# Altium PCB ESC.PcbDoc
Units mil, origin at the board's own origin, x right, y up, seen from the top; angles counter-clockwise.
Board outline 1970 x 910 mil, 4 copper layers (Top Layer, Layer 1, Layer 2, Bottom Layer), stack 23.756 mil thick; 44 components, 33 nets, 150 pads, 30 vias.
Unrouted connection lines stored in the file: 7.
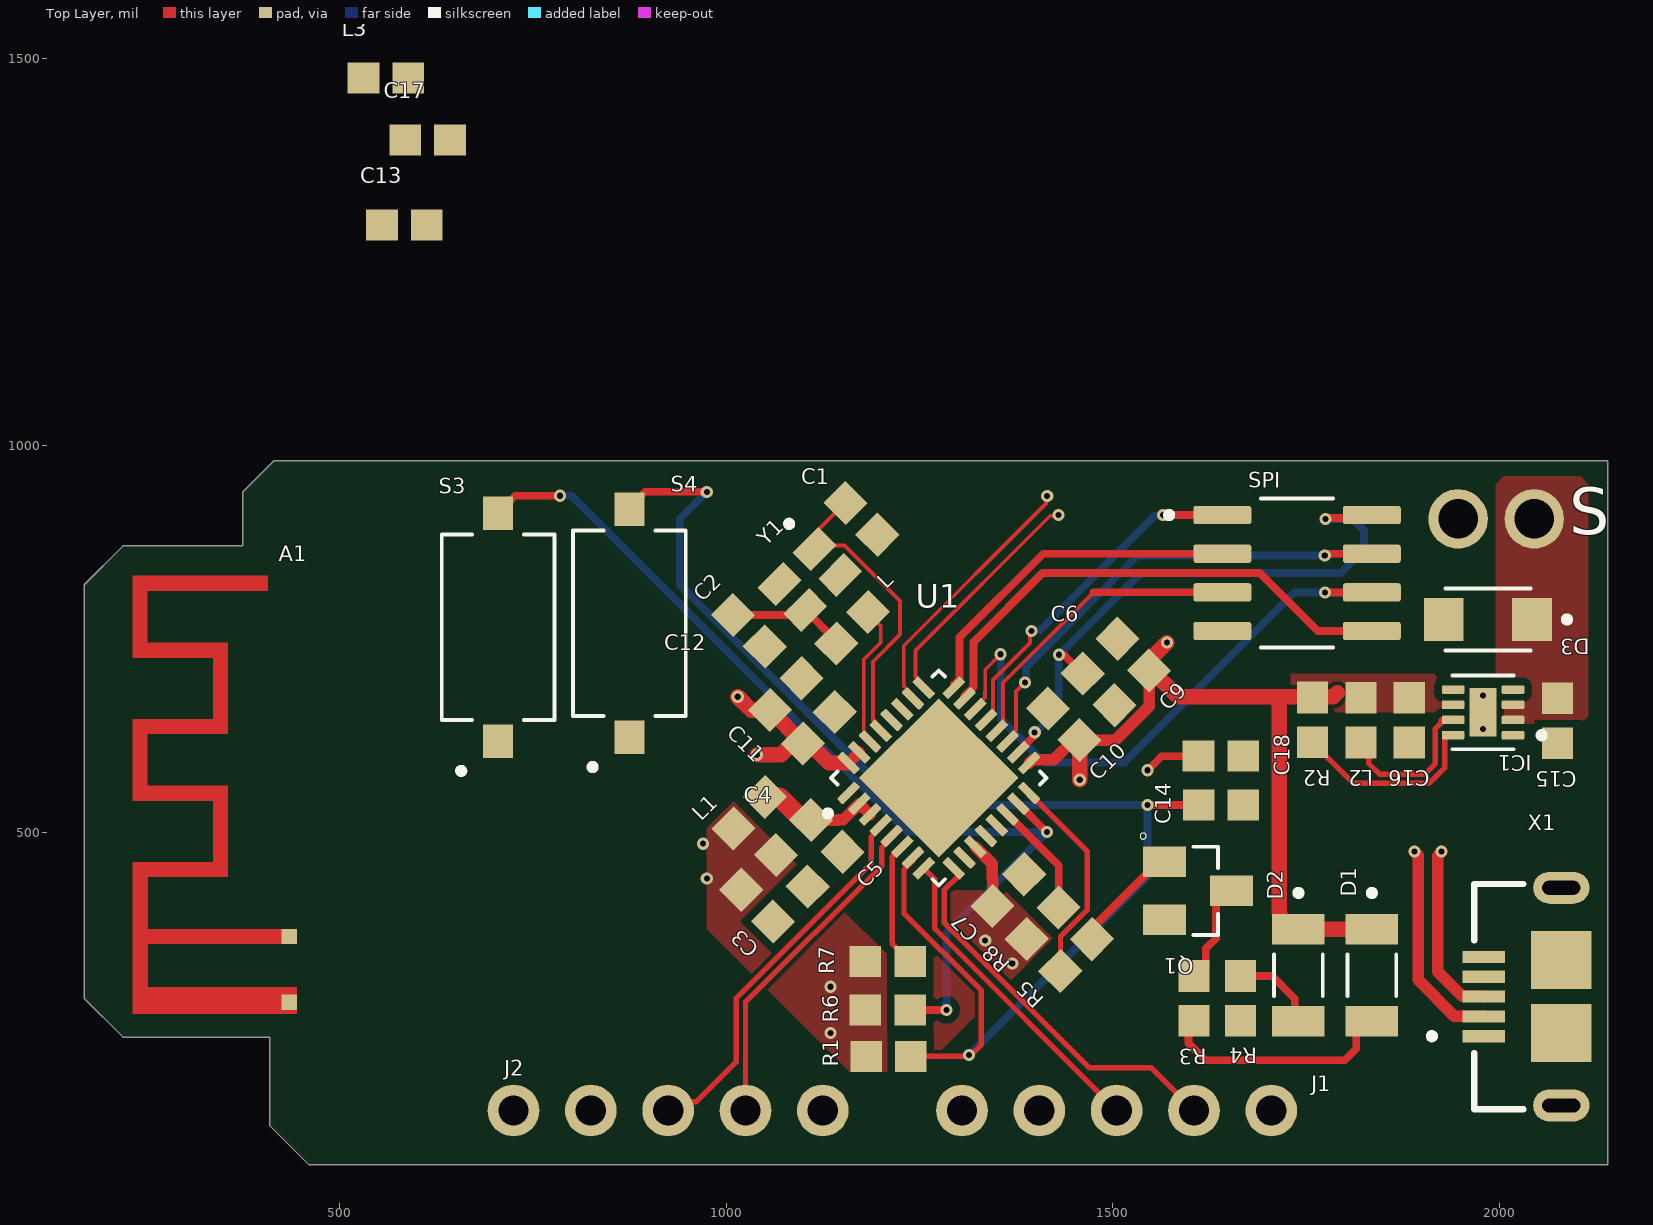
[diagram p0: Top Layer view]
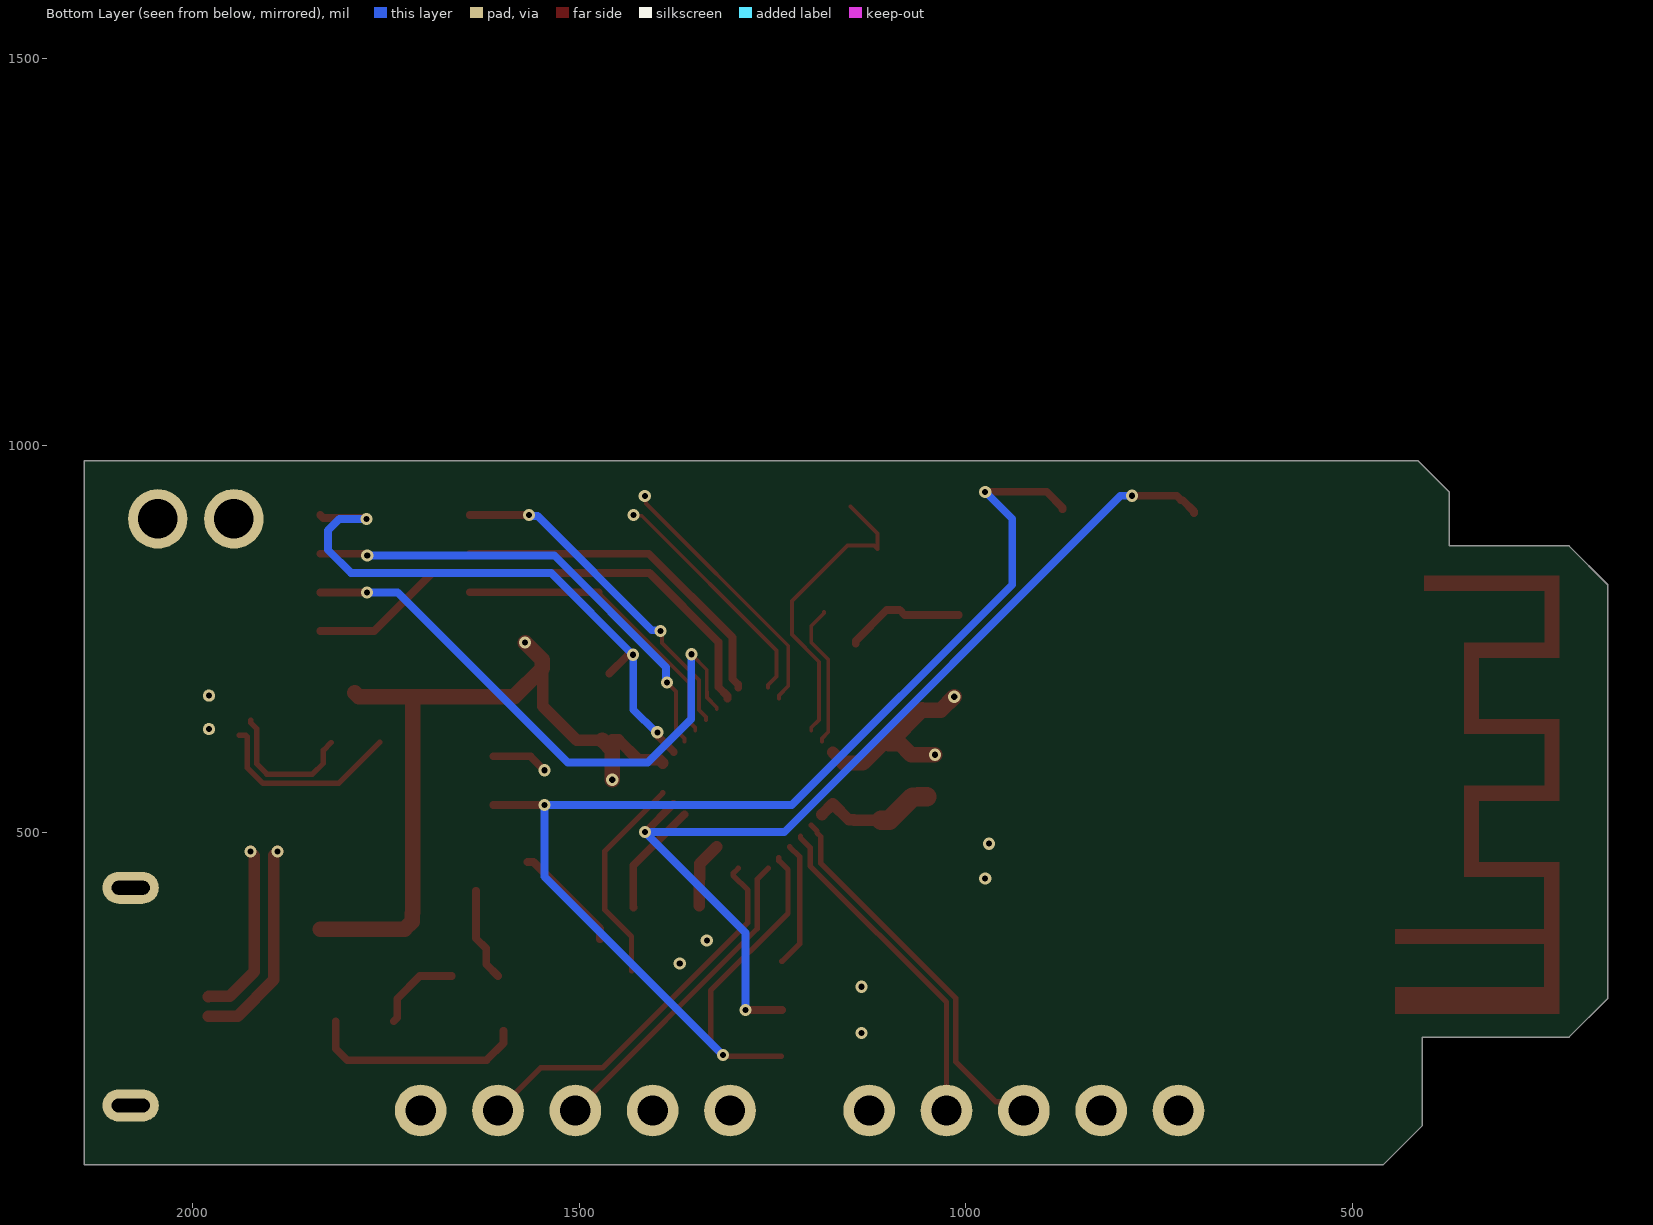
[diagram p1: Bottom Layer view, seen from below]
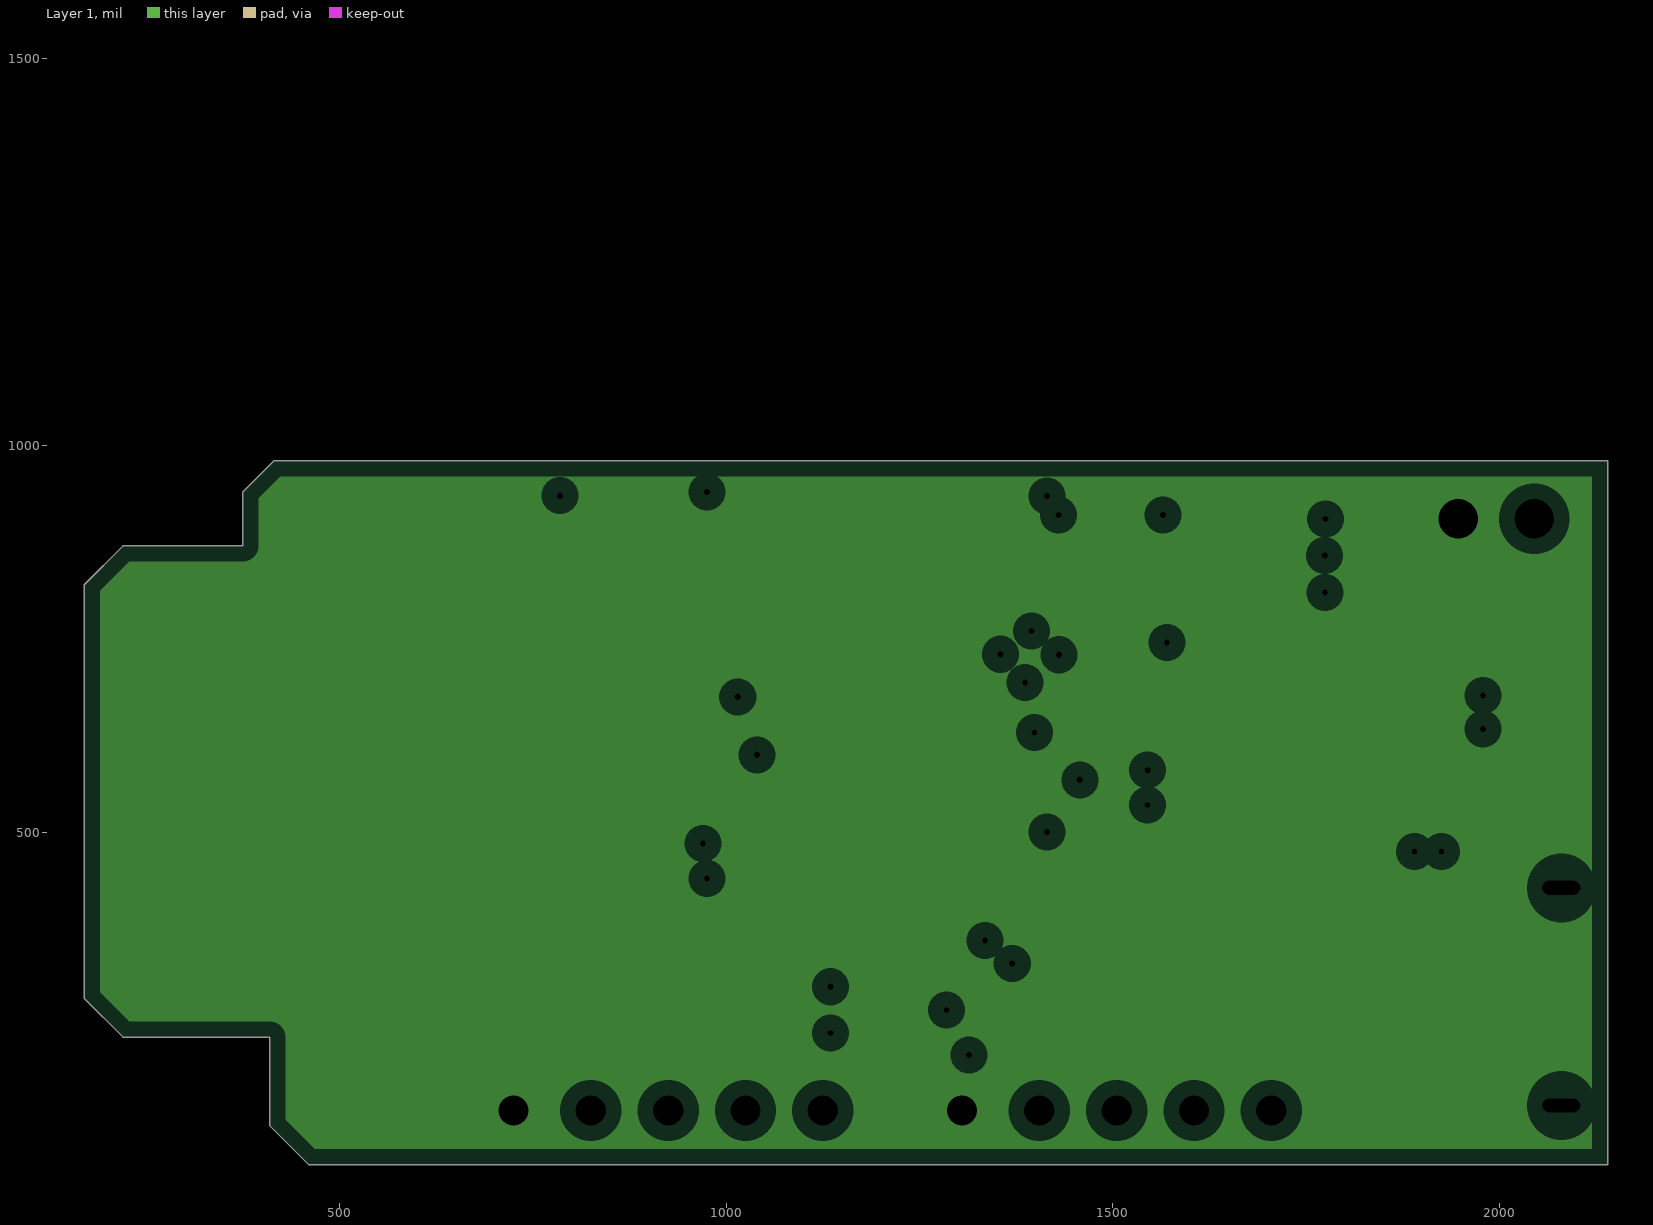
[diagram p2: Layer 1, clearances drawn from the general rule]
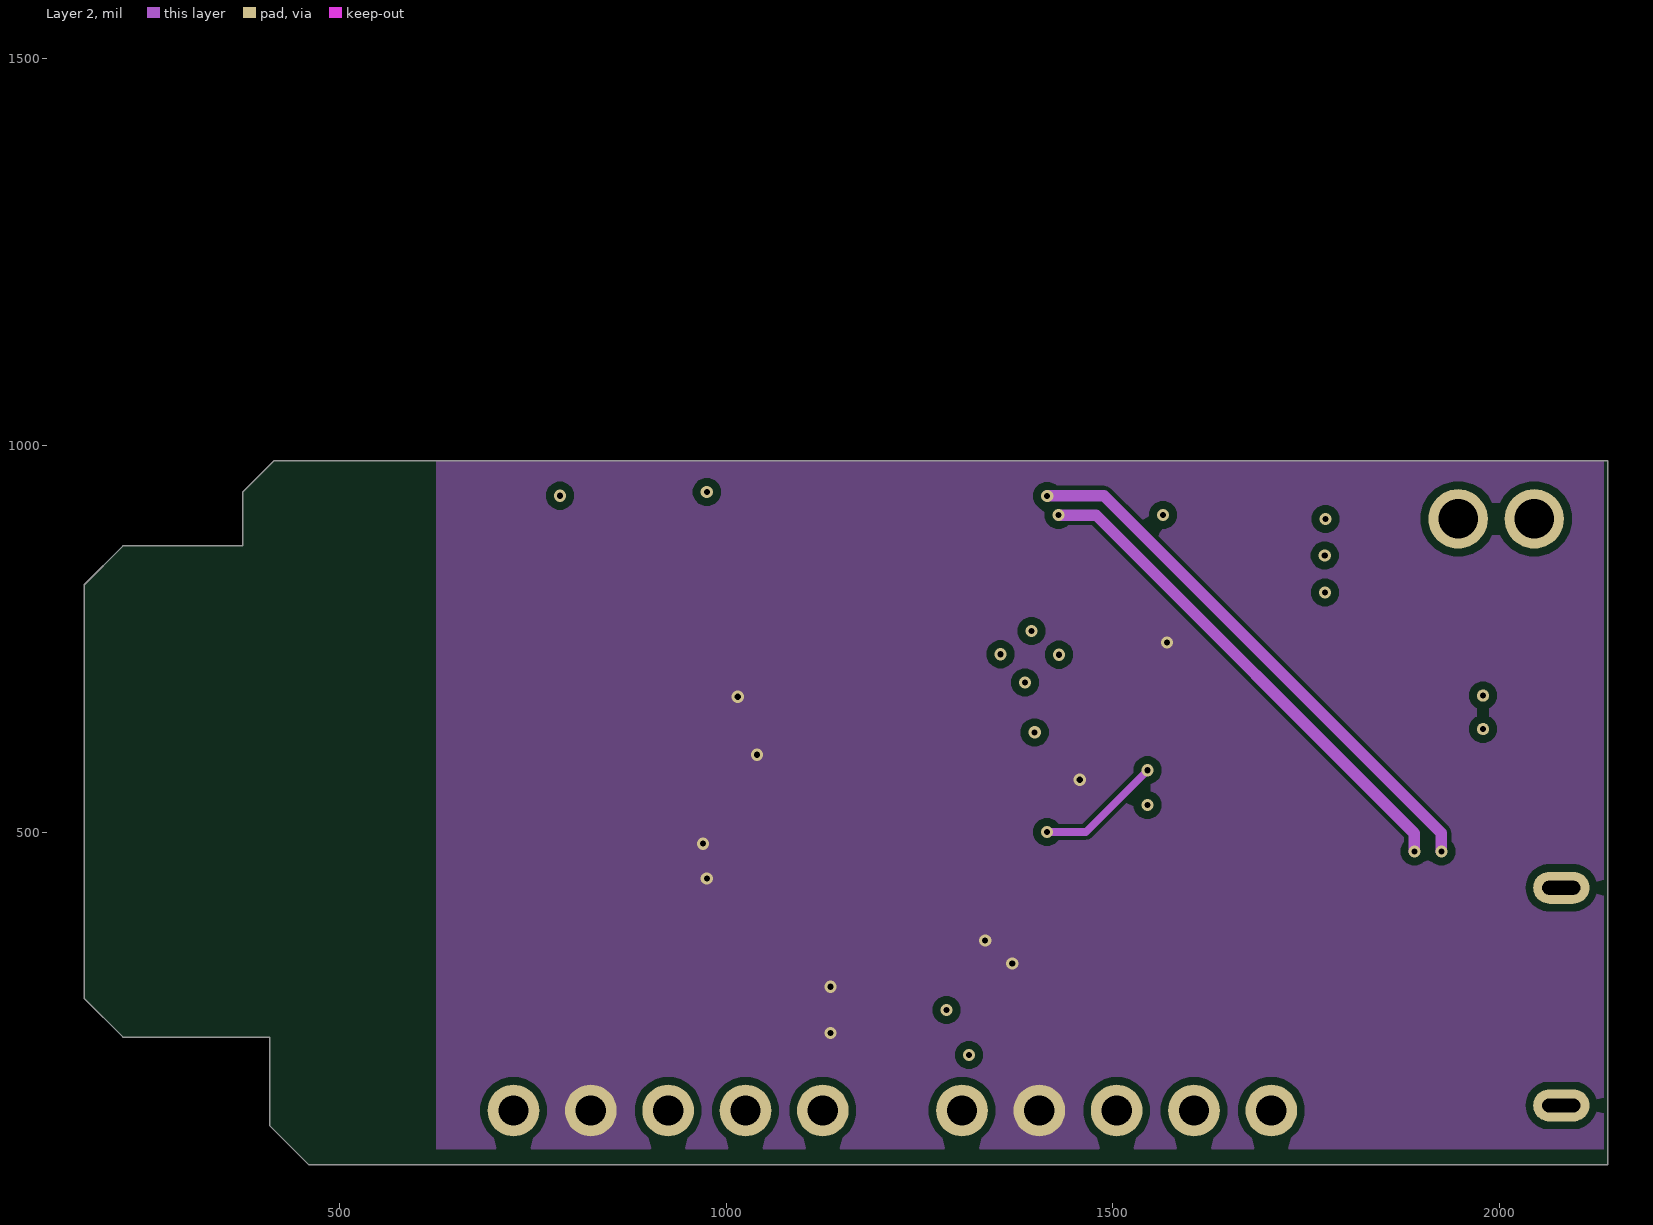
[diagram p3: Layer 2]
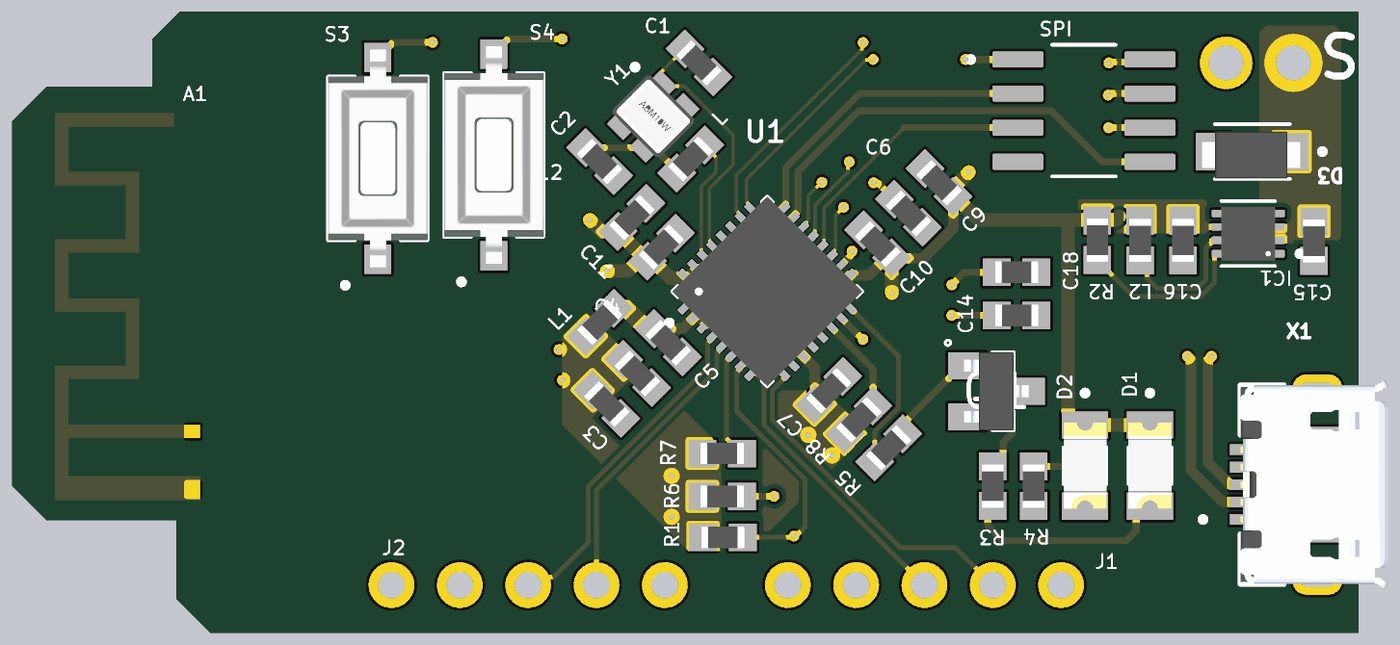
[diagram p4: 3D render of the assembled board from above, using the file's embedded part models]

## Layer stack, top to bottom
Top Solder: solder mask 0.4, Solder Resist, Dk 3.5
Top Layer: signal copper 1.4
Dielectric 2: prepreg 2.8, PP-006, Dk 4.1
Layer 1: plane copper 1.378, net GND
Dielectric 1: dielectric 12.6, FR-4, Dk 4.8
Layer 2: signal copper 1.378
Dielectric 3: prepreg 2.8, PP-006, Dk 4.1
Bottom Layer: signal copper 1.4
Bottom Solder: solder mask 0.4, Solder Resist, Dk 3.5

## Board outline
410,120 460,70 2140,70 2140,980 415,980 375,940 375,870 220,870 170,820 170,285 220,235 410,235

## Design rules (kind name [scope] priority, off if disabled: settings)
Clearance [All] p1: gap=10 ignorepadtopadclearanceinfootprint=TRUE except(0: Arc-Via Track-Via SMDPad-Via; 2: SMDPad-SMDPad; 5: Arc-Arc Arc-Track Arc-SMDPad Arc-Fill Arc-Poly Arc-Region Track-Track Track-SMDPad Track-Fill Track-Poly Track-Region)
DiffPairsRouting [All] p1: maxlimit=10 minlimit=10 mostfreqgap=10 toplayer_minwidth=5 toplayer_maxwidth=15 toplayer_prefwidth=15 midlayer1_minwidth=15 midlayer1_maxwidth=15 midlayer1_prefwidth=15 bottomlayer_minwidth=15 bottomlayer_maxwidth=15 bottomlayer_prefwidth=15 maxuncoupledlength=500
PlaneClearance [All] p1: clearance=20
PlaneConnect [All] p1: planeconnectstyle=Direct reliefexpansion=20 reliefentries=4 reliefconductorwidth=10 reliefairgap=10
PolygonConnect [All] p1: connectstyle=Direct reliefconductorwidth=10 reliefentries=4 polygonreliefangle="90 Angle" airgapwidth=10
RoutingVias [All] p1: holewidth=5.91 width=9.84 viastyle="Through Hole" minholewidth=5.91 minwidth=9.84 maxholewidth=28 maxwidth=50
SolderMaskExpansion [All] p1: expansion=4 istentingtop=FALSE
SupplyNets "Schematic Supply Nets_2" [InNet('VIN')] p1: voltage=0.000
SupplyNets "Schematic Supply Nets_1" [InNet('+3.3V')] p2: voltage=0.000
SupplyNets "Schematic Supply Nets" [InNet('GND')] p3: voltage=0.000
ViasUnderSMD [All] p1: allowed=TRUE
Width [All] p1: maxlimit=50 minlimit=5 preferedwidth=10 midlayer1_minwidth=10 bottomlayer_minwidth=10 minimp=50.000000 maximp=50.000000 favimp=50.000000
27 further rules are at their usual default settings.

## Classes and differential pairs
differential pair USB_D: +USB_D_P -USB_D_N

## Components (designator, comment, footprint, x,y, rotation, side; value= is the part's Value field where it differs from the comment)
A1 "Antenna" Antenna 445,245 r90 top
C1 "C_8pF" 0603 1175,905 r135 top
C2 "C_8pF" 0603 1029.54,760.46 r135 top
C3 "C_10uF" 0603 1040,405 r135 top
C4 "C_0.1uF" 0603 1085,450 r135 top
C5 "C_1uF" 0603 1130,495 r135 top
C6 "C_1uF" 0603 1481.58,684.58 r135 top
C7 "C_0.1uF" 0603 1365,425 r225 top
C9 "C_10uF" 0603 1526.58,729.58 r315 top
C10 "C_0.1uF" 0603 1436.58,639.58 r315 top
C11 "C_1uF" 0603 1076.99,678.45 r225 top
C12 "C_10nF" 0603 1120,635 r225 top
C13 "C_3p3F" 0603 583.94,1285 r0 top
C14 "C_1uF" 0603 1640,535 r180 top
C15 "C_10uF" 0603 2075,643.94 r90 top
C16 "C_22uF" 0603 1883.36,644.83 r90 top
C17 "C_3p3F" 0603 613.94,1395 r0 top
C18 "C_0.1uF" 0603 1639.88,598.15 r180 top
D1 "LED" LEDC3216X120N 1835,315 r270 top
D2 "LED" LEDC3216X120N 1740,315 r270 top
D3 "TVS_7V" TVS_6V 1985,775 r180 top
IC1 "TPS62172DSGT" TPS62172 1978.78,654.84 r180 top
J1 "Joystick" joystick 1305,140 r0 top
J2 "Joystick" joystick 725,140 r0 top
L "L_24nH" 0603 1162.92,764.14 r45 top
L1 "L_2nH" 0603 1030,525 r45 top
L2 "L_2.2uH" 0603 1820.71,644.83 r270 top
L3 "L_2n2H" 0603 560,1475 r0 top
Q1 "BJT" SOT95P240X111-3N 1610.25,423.98 r0 top
R1 "R_100k" 0603 1210,210 r180 top
R2 "R_10k" 0603 1758.15,645.18 r270 top
R3 "R_220" 0603 1605,285 r270 top
R4 "R_220" 0603 1665,285 r90 top
R5 "R_1k" 0603 1452.61,341.05 r45 top
R6 "R_10k" 0603 1208.94,270 r180 top
R7 "R_10k" 0603 1208.94,332.79 r180 top
R8 "R_10k" 0603 1409.24,382.05 r225 top
S "screwconnect" supply 1946.57,905 r180 top
S3 "switch" switch 705,765 r90 top
S4 "switch" switch 875,770 r90 top
SPI "SST26VF016B" SOIC127P600X175-8N 1738.35,835 r0 top
U1 "ESP32-C3" QFN50P500X500X90-33N 1275,570 r45 top
X1 "USB3090-XX-X_REVE2" GCT_USB3090-XX-X_REVE2 2080,287.24 r90 top
Y1 "ABM10W-40.0000MHZ-8-D1X-T3" XTAL_ABM10W-40.0000MHZ-8-D1X-T3 1108.22,826.64 r315 top

## Footprints (in the part's own frame and the unit in brackets; to place one, negate y for a bottom-side part, rotate by r counter-clockwise, add the part's x,y. Pads: shape width x height; smd on the part's side, far side on the other; paste and mask are expansions set on the pad)
0603 [mm]
  rect 1.04x1.02 smd: 1(-0.735,0) 2(0.735,0)
  body extent -0.8,-0.4 0.8,0.4, height 0.55
Antenna [mil]
  rect 19.68x19.68 smd paste-99999 mask+4: 1(120,10) 2(35,10)
  Top Layer region: 215,89.04 300,89.04 300,108.73 215,108.73
  Top Layer region: 19.56,0 54.99,0 54.99,200 19.56,200
  Top Layer region: 110.24,0.07 129.92,0.07 129.92,195.07 110.24,195.07
  Top Layer region: 196.85,89.04 216.54,89.04 216.54,200.07 196.85,200.07
  Top Layer region: 295.28,89.04 314.96,89.04 314.96,195.07 295.28,195.07
  Top Layer region: 381.89,89.04 401.57,89.04 401.57,200.07 381.89,200.07
  Top Layer region: 400,89.04 490,89.04 490,108.73 400,108.73
  Top Layer region: 480.31,89.04 500,89.04 500,200.07 480.31,200.07
  Top Layer region: 480.31,192.98 586.61,192.98 586.61,212.66 480.31,212.66
  Top Layer region: 566.92,37.78 586.6,37.78 586.6,199.99 566.92,199.99
  Top Layer region: 19.56,192.91 216.41,192.91 216.41,212.6 19.56,212.6
  Top Layer region: 295.28,192.98 401.57,192.98 401.57,212.66 295.28,212.66
GCT_USB3090-XX-X_REVE2 [mm]
  rect 0.4x1.4 smd: 1(-1.3,2.55) 2(-0.65,2.55) 3(0,2.55) 4(0.65,2.55) 5(1.3,2.55)
  oval 1.05x1.85 hole 0.45 slot 1.25 at 90 deg: SH1(-3.575,0) SH4(3.575,0)
  rect 1.9x2 smd: SH2(-1.2,0) SH3(1.2,0)
  silkscreen extent -3.7,1.24 3.7,4.35, body extent -3.9,-2.64 3.9,2.86, height 2.71
joystick [mm]
  round 1.7 hole 1: 1(0,0) 2(2.54,0) 3(5.08,0) 4(7.62,0) 5(10.16,0)
LEDC3216X120N [mm]
  rect 1.01x1.73 smd: NEG(1.51,0) POS(-1.51,0)
  silkscreen extent -2.8,-0.8 0.68,0.8, body extent -1.6,-0.8 1.6,0.8, height 1.2
QFN50P500X500X90-33N [mm]
  rrect25% 0.81x0.27 smd mask+0: 1(-2.445,1.75) 2(-2.445,1.25) 3(-2.445,0.75) 4(-2.445,0.25) 5(-2.445,-0.25) 6(-2.445,-0.75) 7(-2.445,-1.25) 8(-2.445,-1.75) 17(2.445,-1.75) 18(2.445,-1.25) 19(2.445,-0.75) 20(2.445,-0.25) 21(2.445,0.25) 22(2.445,0.75) 23(2.445,1.25) 24(2.445,1.75)
  rrect25% 0.27x0.81 smd mask+0: 9(-1.75,-2.445) 10(-1.25,-2.445) 11(-0.75,-2.445) 12(-0.25,-2.445) 13(0.25,-2.445) 14(0.75,-2.445) 15(1.25,-2.445) 16(1.75,-2.445) 25(1.75,2.445) 26(1.25,2.445) 27(0.75,2.445) 28(0.25,2.445) 29(-0.25,2.445) 30(-0.75,2.445) 31(-1.25,2.445) 32(-1.75,2.445)
  rect 3.7x3.7 smd paste-0.68 mask+0.05: 33(0,0)
  silkscreen extent -3.5,-2.5 2.5,2.5, body extent -2.5,-2.5 2.5,2.5, height 0.9
SOIC127P600X175-8N [mm]
  rrect25% 1.9x0.6 smd: 1(-2.455,1.905) 2(-2.455,0.635) 3(-2.455,-0.635) 4(-2.455,-1.905) 5(2.455,-1.905) 6(2.455,-0.635) 7(2.455,0.635) 8(2.455,1.905)
  silkscreen extent -4.3,-2.45 1.18,2.45
SOT95P240X111-3N [mm]
  rect 1.4x1 smd: 1(-1.1,0.95) 2(-1.1,-0.95) 3(1.1,0)
  silkscreen extent -1.9,-1.45 0.65,1.9, body extent -1.2,-1.45 1.2,1.45, height 1.11
supply [mm]
  round 1.95 hole 1.3: 1(-2.5,0) 2(0,0)
switch [mm]
  rect 1.1x1 smd: 1(-3.75,0) 2(3.75,0)
  silkscreen extent -4.82,-1.85 3.05,1.85, body extent -4.05,-1.85 4.05,1.85, height 2.5
TPS62172 [mm]
  rrect25% 0.74x0.28 smd paste+0 mask+0.102: 1(-0.985,0.75) 2(-0.985,0.25) 3(-0.985,-0.25) 4(-0.985,-0.75) 5(0.985,-0.75) 6(0.985,-0.25) 7(0.985,0.25) 8(0.985,0.75)
  rect 0.9x1.6 smd paste-2 mask+0.102: 9(0,0)
  round 0.4 hole 0.2 mask+0: 9_1(0,0.55) 9_2(0,-0.55)
  silkscreen extent -2.02,-1.21 1,1.21, body extent -1,-1 1,1, height 0.8
TVS_6V [mm]
  rect 1.3x1.4 smd paste+0 mask+0.102: 1(-1.45,0) 2(1.45,0)
  silkscreen extent -2.7,-1.02 1.4,1.02, body extent -1.78,-0.75 1.87,1, height 1
XTAL_ABM10W-40.0000MHZ-8-D1X-T3 [mm]
  rect 0.85x1.2 smd: 1(-0.6,0.812) 2(-0.6,-0.812) 3(0.6,-0.812) 4(0.6,0.812)
  silkscreen extent -1.87,0.71 -1.68,0.91, body extent -1.25,-1 1.25,1, height 0.6

## Part data
D1 D2: "2.6 V Red LED SMD", Package=None, Check_prices=https://www.snapeda.com/parts/LHN974%20RED%20LED%201206/Osram/view-part/?ref=eda, MF=Osram, MP="LHN974 RED LED 1206", SnapEDA_Link=https://www.snapeda.com/parts/LHN974%20RED%20LED%201206/Osram/view-part/?ref=snap
D3: "600W Surface Mount TVS Diode", Package=None, Availability=Unavailable, Check_prices=https://www.snapeda.com/parts/SMBJ7.5A/Littelfuse/view-part/?ref=eda, MF="Littelfuse Inc.", MP=SMBJ7.5A, Price=None, SnapEDA_Link=https://www.snapeda.com/parts/SMBJ7.5A/Littelfuse/view-part/?ref=snap
IC1: "Buck Switching Regulator IC Positive Fixed 3.3V 1 Output 500mA 8-WFDFN Exposed Pad", Package="WSON-8 Texas Instruments", Check_prices=https://www.snapeda.com/parts/TPS62172DSG/Texas+Instruments/view-part/?ref=eda, MF="Texas Instruments", MP=TPS62172DSG, SnapEDA_Link=https://www.snapeda.com/parts/TPS62172DSG/Texas+Instruments/view-part/?ref=snap
L L1 L2 L3: Package="2016 Murata", Availability=Unavailable, MF="Murata Electronics", MP=DFE201612E-2R2M=P2, Price=None, SnapEDA_Link=https://www.snapeda.com/parts/DFE201612E-2R2M%3DP2/Murata%20Electronics%20North%20America/view-part/703024/?ref=snap
Q1: "Transistor, Bipolar,Si,NPN,General Purpose,VCEO 40VDC,IC 200mA,PD 225mW,SOT-23", Package="SOT-23-3 ON Semiconductor", Check_prices=https://www.snapeda.com/parts/MMBT3904LT1G/Onsemi/view-part/?ref=eda, MF="ON Semiconductor", MP=MMBT3904LT1G, SnapEDA_Link=https://www.snapeda.com/parts/MMBT3904LT1G/Onsemi/view-part/?ref=snap
R1 R2 R3 R4 R5 R6 R7 R8: Package="RADIAL-2 YAGEO", Check_prices=https://www.snapeda.com/parts/MFR-25FBF52-10K/Yageo/view-part/?ref=eda, MF=Yageo, MP=MFR-25FBF52-10K, SnapEDA_Link=https://www.snapeda.com/parts/MFR-25FBF52-10K/Yageo/view-part/?ref=snap
S: "2 Position Wire to Board Terminal Block Horizontal with Board 0.197 (5.00mm) Through Hole", Package=None, Check_prices=https://www.snapeda.com/parts/691137710002/W%25C3%25BCrth+Elektronik+Midcom/view-part/?ref=eda, MF="WÃ¼rth Elektronik", MP=691137710002, SnapEDA_Link=https://www.snapeda.com/parts/691137710002/W%25C3%25BCrth+Elektronik+Midcom/view-part/?ref=snap
S3 S4: "6.1 x 3.7 mm, 2.5 mm Actuator Height, 160 gf, White, Surface Mount, SPST, Tactile Switch /  / TS09-63-25-WT-160-SMT-TR", Package=None, Check_prices=https://www.snapeda.com/parts/TS09-63-25-WT-160-SMT-TR/Same+Sky/view-part/?ref=eda, MF="Same Sky", MP=TS09-63-25-WT-160-SMT-TR, SnapEDA_Link=https://www.snapeda.com/parts/TS09-63-25-WT-160-SMT-TR/Same+Sky/view-part/?ref=snap
U1: "WiFi Modules (802.11) (Engineering Samples Only) SMD IC ESP32-C3, RISC-V single-core MCU, 2.4G Wi-Fi & BLE 5.0 combo, QFN 32-pin, 5*5 mm, 40 ~ 105C", Package="VFQFN-32 Espressif Systems", Check_prices=https://www.snapeda.com/parts/ESP32-C3/Espressif+Systems/view-part/?ref=eda, MF="Espressif Systems", MP=ESP32-C3, SnapEDA_Link=https://www.snapeda.com/parts/ESP32-C3/Espressif+Systems/view-part/?ref=snap
X1: "USB - micro AB USB 2.0 Receptacle Connector 5 Position Surface Mount, Right Angle; Through Hole, 2.35mm profile, 5 Pins, Horizontal, Bottom mount", Package=None, Check_prices=https://www.snapeda.com/parts/USB3090-30-A/Global+Connector+Technology/view-part/?ref=eda, MF="Global Connector Technology", MP=USB3090-30-A, SnapEDA_Link=https://www.snapeda.com/parts/USB3090-30-A/Global+Connector+Technology/view-part/?ref=snap
Y1: "IoT OPTIMIZED LOW PROFILE QUARTZ CRYSTAL", Package="SMD-4 Abracon", Check_prices=https://www.snapeda.com/parts/ABM10W-40.0000MHZ-8-D1X-T3/Abracon/view-part/?ref=eda, MF=Abracon, MP=ABM10W-40.0000MHZ-8-D1X-T3, SnapEDA_Link=https://www.snapeda.com/parts/ABM10W-40.0000MHZ-8-D1X-T3/Abracon/view-part/?ref=snap

## Via types
v1: diameter 15.75, hole 7.87, Top Layer to Bottom Layer, 30 vias

## Nets (pads, with @x,y where several pads share a name; then routed paths per layer and width w, separated by ;. In a path a pad name is that pad's centre, name@x,y a point inside that pad or via, vN(x,y) a via of type N, cw(c..) or ccw(c..) an arc to the next point about the centre after c; other vN are vias at no path point)
+3.3V: C3.2 C4.2 C7.2 C9.2 C10.2 C11.2 C12.2 C16.2 D1.POS D2.POS IC1.6 J1.2 J2.2 L1.1 L2.1 R1.2 R2.1 R6.2 R7.2 R8.2 U1.11 U1.17 U1.31 U1.32 | length 1342.2
  Top Layer w15: U1.32 U1.31 ; U1.11 1344.29,458.95 1344.29,440.01 1344.82,439.48 1344.82,404.82 C7.2 ; U1.17 1396.21,593.77 1423.77,593.77 1449.12,619.12 C10.2 ; C10.2@1470,618.84 1503.39,618.84 1547.32,662.77 C9.2@1547.32,708.84
  Top Layer w20: v1(1015,675) 1032.29,657.71 1056.25,657.71 C11.2 1056.53,657.77 1099.54,614.76 C12.2 1085.28,614.54 1070.75,600 v1(1040,600) ; C12.2@1099.82,614.82 1107.77,614.82 1133.24,589.35 U1.32 ; v1(1457.32,567.68) 1457.32,606.16 C10.2@1470,618.84 ; v1(1570,745) 1547.71,722.71 1547.71,711.59 1584.3,675 1715,675 ; 1790,680 1785,675 1715,675 ; D1.POS D2.POS 1725.83,374.45 1715.94,384.33 1715.94,395.1 1715,396.05 1715,675
  other v1: 1135,240 1135,300 1370,330 1335,360 975,440 970,485
GND: A1.2 C1.1 C2.1 C3.1 C4.1 C5.1 C6.1 C7.1 C9.1 C10.1 C11.1 C12.1 C13.1 C14.1 C15.1 C16.1 C17.1 C18.1 D3.2 IC1.1 IC1.4 IC1.5 J1.1 J2.1 Q1.2 R4.1 S3.1 S4.1 S.2 SPI.4 X1.5 Y1.2 Y1.4
NetA1_1: A1.1 C13.2 L3.1
NetC1_2: C1.2 U1.29 Y1.1 | length 398.7
  Top Layer w5: C1.2@1149.08,920.92 1114.12,885.97 Y1.1 1119,870.82 1153.27,870.82 1225,799.09 1225,755.36 1190,720.36 1190,645.06 1199.97,635.09 U1.29
NetC2_2: C2.2 L.1 Y1.3 | length 156.4
  Top Layer w10: C2.2 1009.36,780.64 1079.04,780.64 1085.73,787.34 Y1.3 1142.46,747.19 L.1
NetC5_2: C5.2 L1.2 U1.2 U1.3 | length 162.7
  Top Layer w15: C5.2@1109.82,515.18 1144.48,515.18 1145.01,515.71 1151.12,515.71 U1.2 U1.3
  Top Layer w25: L1.2 1050.74,545.74 1061.46,545.74 1061.74,545.46 1068.82,545.46 1098.82,515.46 C5.2
NetC6_2: C6.2 SPI.8 U1.18 | length 783.2
  Top Layer w10: U1.18 1377.86,603.71 1397.93,623.78 1397.93,627.93 v1(1399.03,629.03) ; v1(1430.65,729.35) 1431.75,728.25 1437.91,728.25 C6.2 ; v1(1775,905) 1776.1,906.1 1831.1,906.1 SPI.8
  Bottom Layer w10: v1(1399.03,629.03) 1400.58,629.03 1430,658.44 1430,728.7 v1(1430.65,729.35) 1536.3,835 1795,835 1825,865 1825,890 1810,905 v1(1775,905)
NetC14_2: C14.2 R1.1 S4.2 U1.7 | length 1838.6
  Top Layer w7: R1.1 1315,210 1330,225 1330,295 1230,395 1230,451.42 1241.73,463.15 U1.7
  Top Layer w10: S4.2 875,919.61 895.39,940 v1(975,940) ; v1(1545,535) C14.2
  Bottom Layer w10: v1(975,940) 940,905 940,820 1225,535 v1(1545,535) 1545,442.59 v1(1314.15,211.74)
NetC17_2: C17.2 L3.2 U1.1
NetC18_2: C18.2 R6.1 S3.2 U1.15 | length 1520.5
  Top Layer w10: S3.2 705,914.61 719.69,929.29 721.65,929.29 727.36,935 v1(785,935) ; R6.1 v1(1285,270) ; U1.15 1378.07,536.73 1414.8,500 v1(1415,500) ; v1(1545,580) 1563.15,598.15 C18.2
  Layer 2 w10: v1(1415,500) 1465,500 v1(1545,580)
  Bottom Layer w10: v1(785,935) 800,935 1235,500 v1(1415,500) 1285,370 v1(1285,270)
NetD1_NEG: D1.NEG R3.2 | length 284.2
  Top Layer w10: R3.2@1597.85,243.21 1597.85,227.15 1620,205 1800,205 1815,220 D1.NEG@1815,255.55
NetD2_NEG: D2.NEG R4.2 | length 113.5
  Top Layer w10: R4.2 1706.06,313.94 1735.42,284.58 1735.42,260.13 D2.NEG
NetIC1_7: IC1.7 L2.2 | length 188.6
  Top Layer w7: L2.2 1830.98,605.64 1830.98,589.02 1845,575 1903.92,575 1916.93,588.01 1916.93,633.54 1925,641.61 1925,645
NetIC1_8: IC1.8 R2.2 | length 253.3
  Top Layer w7: R2.2 1758.15,615.85 1811,563 1908.89,563 1929.34,583.45 1929.34,623.3 1931.35,625.31 IC1.8
NetJ1_3: J1.3 U1.8 | length 416.5
  Top Layer w7: U1.8 1270,438.87 1270,375 J1.3
NetJ1_4: J1.4 U1.9 | length 504.4
  Top Layer w7: U1.9 1300.92,446.64 1300.92,444.07 1282,425.15 1282,383 1470,195 1550,195 J1.4
NetJ2_3: J2.3 U1.4 | length 497.4
  Top Layer w7: J2.3 936.47,151.47 961.47,151.47 1013,203 1013,284.97 1187.64,459.61 1187.64,493.99 1192.46,498.81 1192.46,501.38 U1.4
NetJ2_4: J2.4 U1.5 | length 433.2
  Top Layer w7: J2.4 1025,280 1201.41,456.41 1201.41,479.92 1213.89,492.41 U1.5
NetL_2: L.2 U1.30 | length 186.8
  Top Layer w5: L.2 1183.39,782.97 1200,766.35 1200,745 1177.99,722.99 1177.99,629.23 1186.05,621.17 U1.30
NetQ1_1: Q1.1 R5.2 | length 143.4
  Top Layer w10: R5.2 1473.07,375.38 1559.07,461.38 Q1.1
NetQ1_3: Q1.3 R3.1 | length 121.9
  Top Layer w10: R3.1 1620.08,329.02 1620.08,349.41 1633.56,362.89 Q1.3@1633.56,423.98
NetR5_1: R5.1 U1.16 | length 275.6
  Top Layer w7: U1.16 1466.88,475.56 1466.88,399.27 1432.43,364.81 1432.43,320.86 R5.1
NetR7_1: R7.1 U1.6 | length 163.3
  Top Layer w7: U1.6 1227.81,480.95 1215,468.14 1215,355.27 1237.48,332.79 R7.1
NetR8_1: R8.1 U1.14 | length 147.8
  Top Layer w10: U1.14 1429.98,456.77 1429.98,402.79 R8.1
NetSPI_1: SPI.1 U1.21 | length 448.2
  Top Layer w5: U1.21 1336.11,649.01 1345,657.9 1345,696.75 1392.94,744.7 1392.94,757.94 v1(1395,760)
  Top Layer w10: v1(1565,910) SPI.1
  Bottom Layer w10: v1(1395,760) 1396.1,761.1 1406.1,761.1 1553.9,908.9 1563.9,908.9 v1(1565,910)
NetSPI_2: SPI.2 U1.24 | length 452.9
  Top Layer w10: U1.24 1294.35,690.76 1301.86,698.28 1301.74,698.4 1301.74,751.74 1410,860 SPI.2
NetSPI_3: SPI.3 U1.20 | length 397.4
  Top Layer w5: U1.20 1350.03,635.09 1358.09,643.15 1358.09,693.09 1475,810
  Top Layer w10: 1475,810 SPI.3
NetSPI_5: SPI.5 U1.23 | length 660.8
  Top Layer w10: U1.23 1308.27,676.04 1320,687.78 1320,745.86 1409.14,835 1690,835 1765,760 SPI.5
NetSPI_6: SPI.6 U1.22 | length 762.8
  Top Layer w5: U1.22 1322.19,661.19 1334.86,673.86 1334.86,681.33 1335,681.47 1335,710 v1(1355,730)
  Top Layer w10: v1(1774.59,809.9) 1774.64,809.95 SPI.6 SPI.6
  Bottom Layer w10: v1(1355,730) 1355,646.28 1411.28,590 1515,590 1734.9,809.9 v1(1774.59,809.9)
NetSPI_7: SPI.7 U1.19 | length 613.9
  Top Layer w5: U1.19 1363.95,621.04 1375,632.1 1375,681.75 v1(1386.62,693.38)
  Top Layer w10: v1(1774.08,857.81) 1775.63,857.81 1777.82,860 SPI.7
  Bottom Layer w10: v1(1386.62,693.38) 1387.72,694.48 1387.72,713.2 1532.34,857.81 v1(1774.08,857.81)
USB_D_N: U1.25 X1.2 | length 1236.4
  Top Layer w5: U1.25@1255.65,687.01 1255.65,690.31 1244.75,701.21 1244.75,734.75 1419.13,909.13 1429.13,909.13 v1(1430,910)
  Top Layer w15: v1(1890,475) 1894.93,470.07 1894.93,308.84 1941.74,262.03 1979.23,262.03 X1.2
  Layer 2 w15: v1(1430,910) 1478.31,910 1889.86,498.45 1889.86,475.14 v1(1890,475)
USB_D_P: U1.26 X1.3 | length 1288.6
  Top Layer w5: U1.26 1241.73,676.85 1229.75,688.83 1229.75,740.96 1413.52,924.74 1413.52,933.15 v1(1415.19,934.81)
  Top Layer w15: v1(1925,475) 1925,474.47 1920.07,469.54 1920.07,319.26 1951.71,287.62 1979.23,287.62 X1.3
  Layer 2 w15: v1(1415.19,934.81) 1415.37,935 1488.67,935 1924.86,498.81 1924.86,475.14 v1(1925,475)
VIN: C15.2 D3.1 IC1.2 IC1.3 S.1
pads on no net: IC1.9 IC1.9_1 IC1.9_2 J1.5 J2.5 U1.10 U1.12 U1.13 U1.27 U1.28 U1.33 X1.1 X1.4 X1.SH1 X1.SH2 X1.SH3 X1.SH4

## Polygon pours and split planes (outlines as drawn)
+3.3V on Top Layer "+3.3V_L01_P000" (solid, pour order 0): 1730,705 1915,705 1955,665 1955,655 1730,655
+3.3V on Top Layer "+3.3V_L01_P003" (solid, pour order 3): 1210,340 1295,425 1360,425 1422.5,362.5 1250,190 1160,190 975,375 975,505 1010,540
VIN on Top Layer "VIN_L01_P002" (solid, pour order 2): 2000,640 1995,645 1995,950 2005,960 2105,960 2115,950 2115,650 2105,640
+3.3V on Layer 2 "+3.3V_L03_P005" (solid, pour order 5): 625,980 2135,980 2135,90 625,90
GND on Layer 1 (split plane): 2414.9,0 763.32,0 725.1,38.23 725.1,144.9 724.71,148.82 723.57,152.59 721.71,156.07 719.21,159.11 716.17,161.61 712.69,163.47 708.92,164.61 705,165 523.32,165 485.1,203.23 485.1,721.58 523.32,759.81 670,759.81 673.92,760.19 677.69,761.34 681.17,763.19 684.21,765.69 686.71,768.74 688.57,772.21 689.71,775.98 690.1,779.9 690.1,841.58 718.32,869.81 2414.9,869.81

## Text inside footprints (layer, text, board x,y; h text height)
A1: Mechanical 1 "gnd" at 418.67,228 h10 r90
X1: Mechanical 13 "PCB Edge" at 2175,507.24 h26.25 r90